# Altium PCB wien.PcbDoc
Units mm, origin at the board's own origin, x right, y up, seen from the top; angles counter-clockwise.
Board outline 100 x 50 mm, 2 copper layers (Top Layer, Bottom Layer); 19 components, 15 nets, 48 pads, 0 vias.
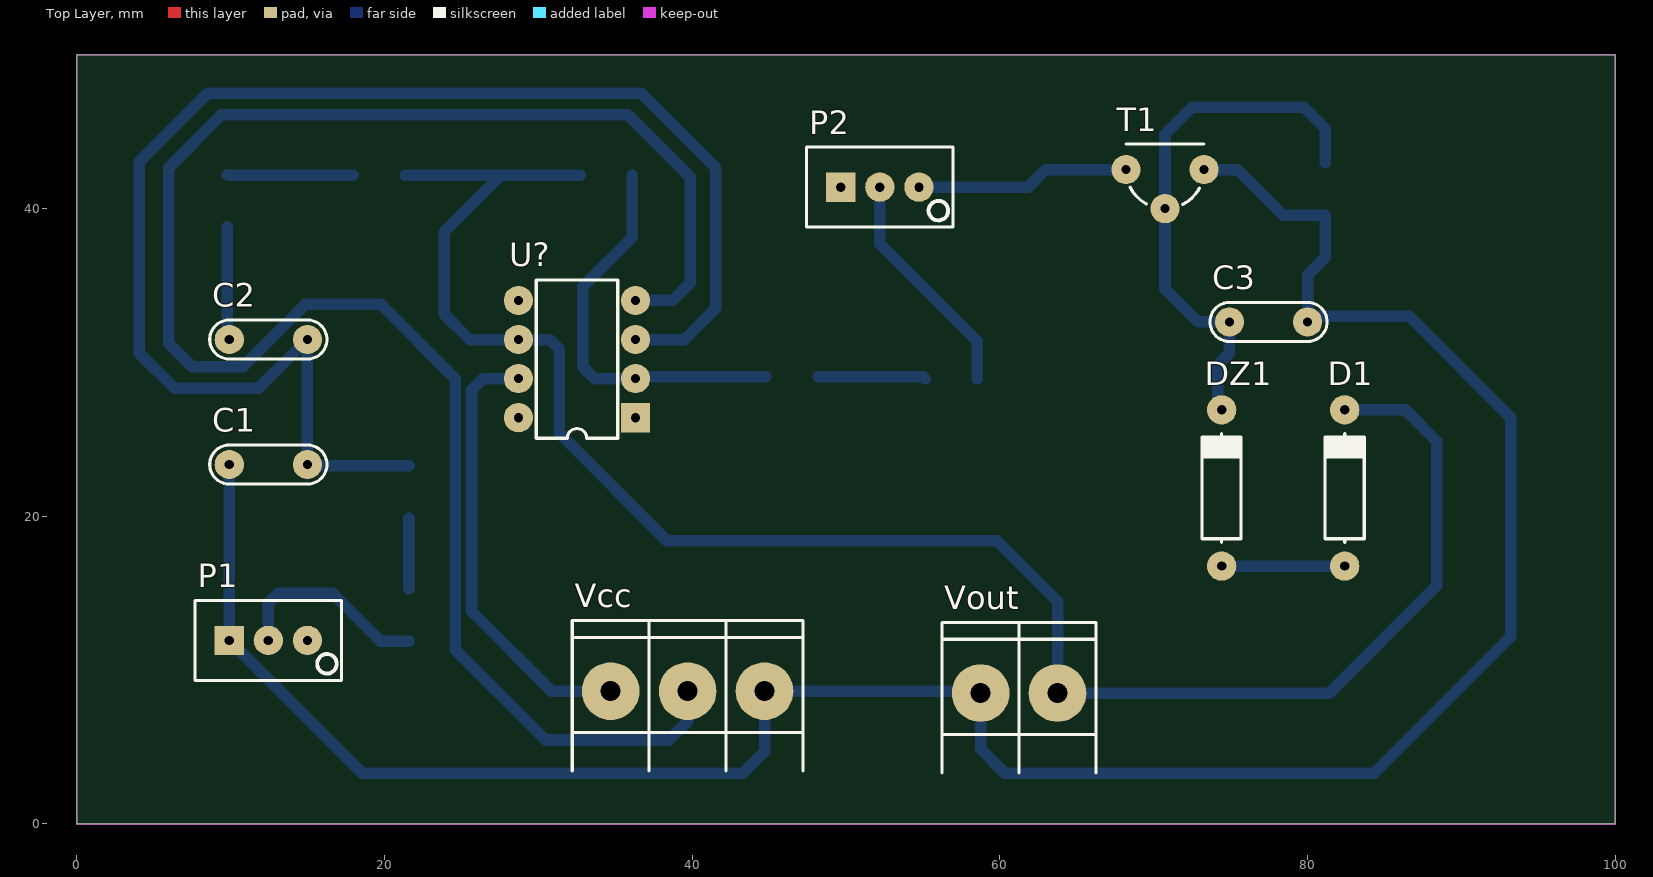
[diagram p0: Top Layer view]
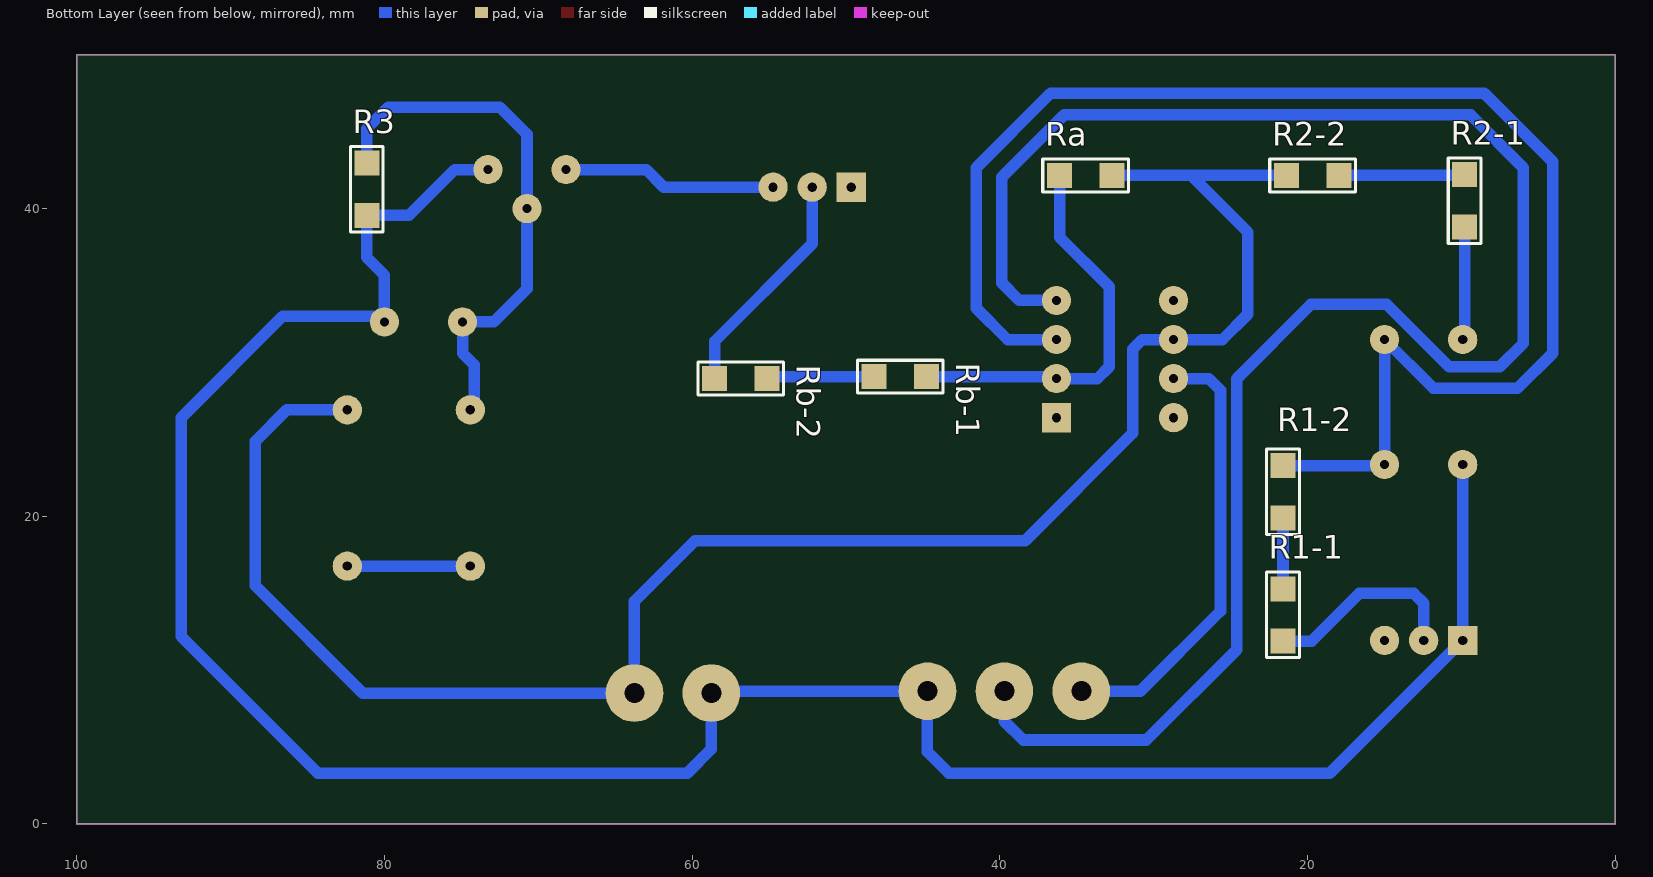
[diagram p1: Bottom Layer view, seen from below]
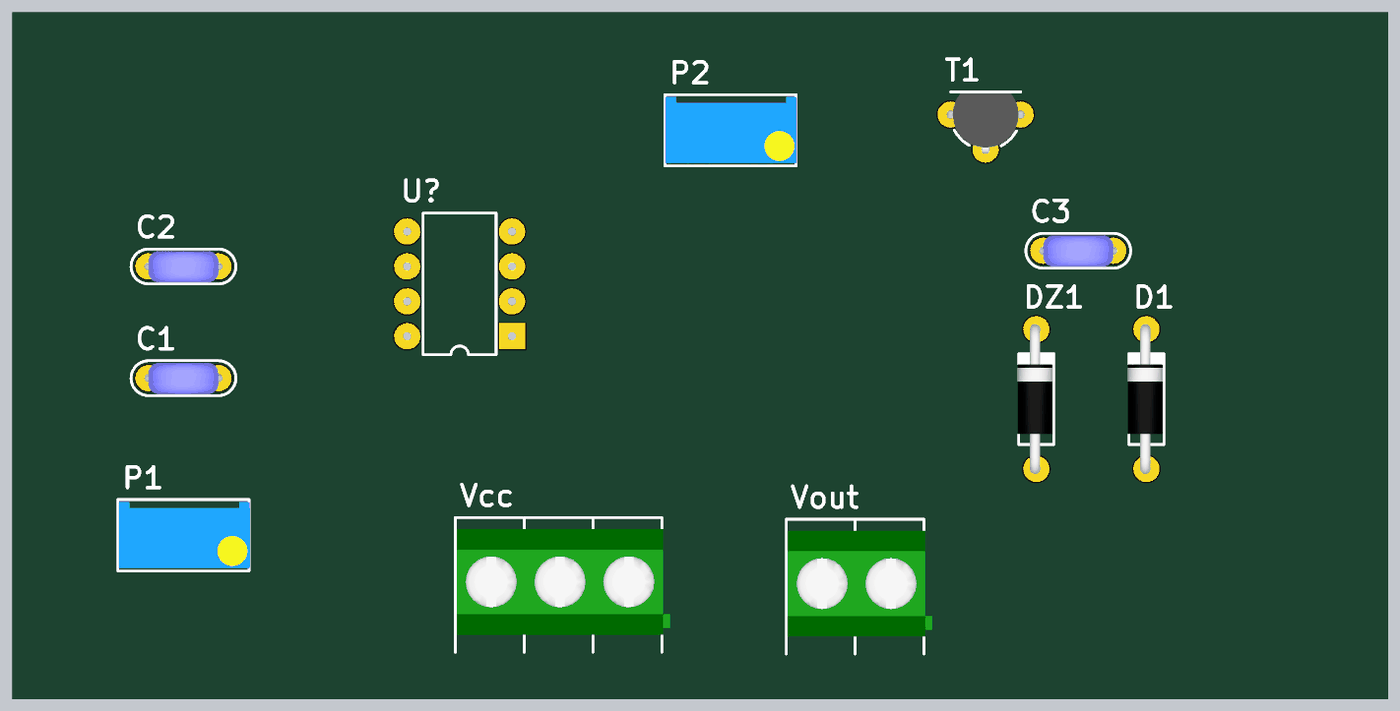
[diagram p2: 3D render of the assembled board from above, using the file's embedded part models]
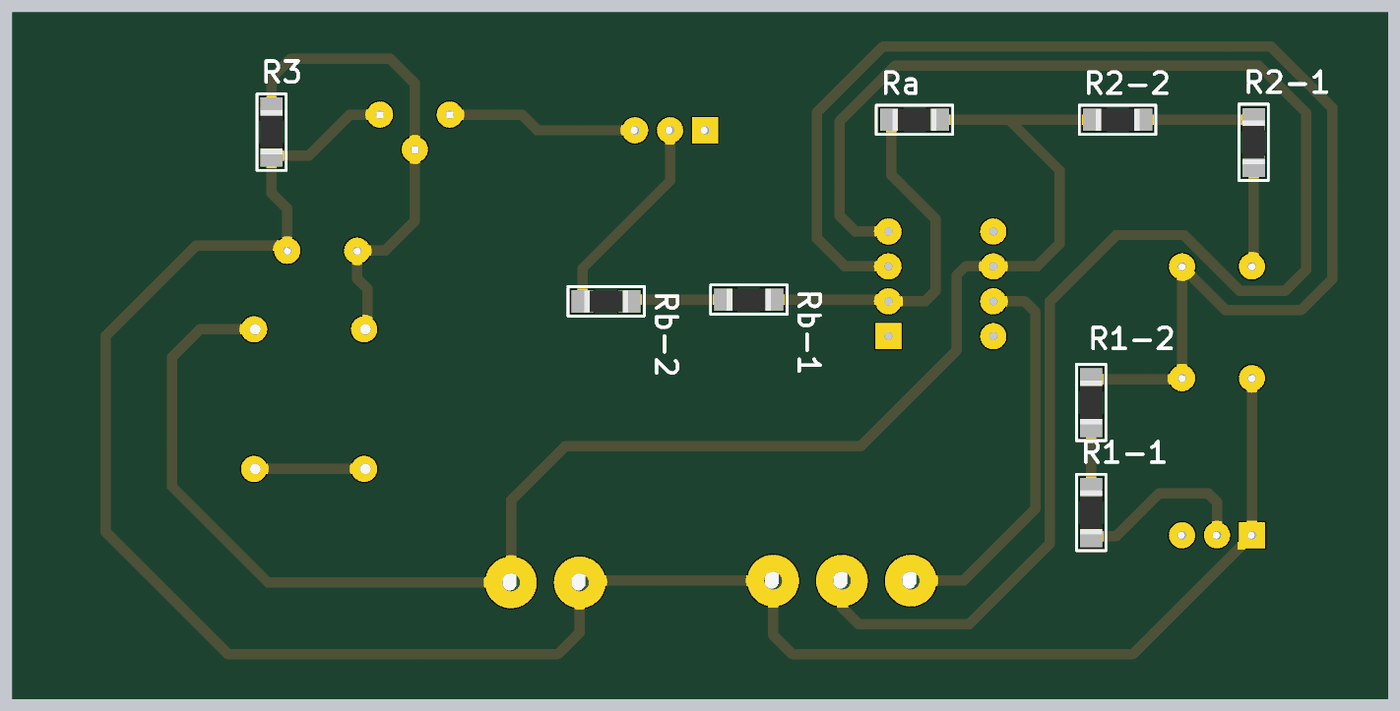
[diagram p3: 3D render of the assembled board from below, using the file's embedded part models]

## Layer stack, top to bottom
Top Solder: solder mask 0.0102, Solder Resist, Dk 3.5
Top Layer: signal copper 0.0356
Dielectric 1: dielectric 0.32, FR-4, Dk 4.8
Bottom Layer: signal copper 0.0356
Bottom Solder: solder mask 0.0102, Solder Resist, Dk 3.5

## Board outline
0,0 100,0 100,50 0,50

## Design rules (kind name [scope] priority, off if disabled: settings)
Clearance [All] p1: gap=0.3 ignorepadtopadclearanceinfootprint=FALSE
PolygonConnect [All] p1: connectstyle=Relief reliefconductorwidth=0.254 reliefentries=4 polygonreliefangle="90 Angle" airgapwidth=0.254
RoutingVias [All] p1: holewidth=0.711 width=1.27 viastyle="Through Hole" minholewidth=0.711 minwidth=1.27 maxholewidth=0.711 maxwidth=1.27
SolderMaskExpansion [All] p1: expansion=0.102
Width [All] p1: maxlimit=0.9 minlimit=0.6 preferedwidth=0.75
30 further rules are at their usual default settings.

## Components (designator, comment, footprint, x,y, rotation, side; value= is the part's Value field where it differs from the comment)
C1 "CAP" CAP200 12.446,23.368 r0 top
C2 "CAP" CAP200 12.446,31.496 r0 top
C3 "CAP" CAP200 77.47,32.639 r0 top
D1 "DIODO" DO41 82.423,21.844 r90 top
DZ1 "DIODO ZENER" DO41 74.422,21.844 r90 top
P1 "PRESET" "PRESET V" 12.446,11.938 r0 top
P2 "PRESET" "PRESET V" 52.197,41.402 r0 top
R1-1 "RES" 1206 21.59,13.589 r90 bottom
R1-2 "RES" 1206 21.59,21.59 r90 bottom
R2-1 "RES" 1206 9.779,40.513 r90 bottom
R2-2 "RES" 1206 19.66,42.164 r0 bottom
R3 "RES" 1206 81.153,41.275 r270 bottom
Ra "RES" 1206 34.417,42.164 r0 bottom
Rb-1 "RES" 1206 46.482,29.083 r180 bottom
Rb-2 "RES" 1206 56.845,28.956 r180 bottom
T1 "TRANSISTOR PNP" TO92 70.739,41.275 r0 top
U? "TL081JG" JG008 32.512,30.226 r90 top
Vcc "BORNERA 3" BORNERA3 39.704,8.636 r270 top
Vout "BORNERA 2" BORNERA2 61.254,8.509 r270 top

## Footprints (in the part's own frame and the unit in brackets; to place one, negate y for a bottom-side part, rotate by r counter-clockwise, add the part's x,y. Pads: shape width x height; smd on the part's side, far side on the other; paste and mask are expansions set on the pad)
1206 [mil] "Pasivo 1206"
  rect 64x64 smd: 1(-67,0) 2(67,0)
  silkscreen extent -109,-42 110,42, body extent -62,-31 63,31, height 20
BORNERA2 [mm] "Bornera con Tornillos 5mm separación"
  round 3.75 hole 1.3: 1(0,2.5) 2(0,-2.5)
  silkscreen extent -4.6,-5 5.2,5, body extent -3.76,-4.89 3.94,5.61, height 10
BORNERA3 [mm] "Bornera con Tornillos 5mm separación"
  round 3.75 hole 1.3: 1(0,5) 2(0,0) 3(0,-5)
  silkscreen extent -4.6,-7.5 5.2,7.5, body extent -3.76,-7.39 3.94,8.11, height 10.05
CAP200 [mm]
  round 1.9 hole 0.6: 1(-2.54,0) 2(2.54,0)
  silkscreen extent -3.81,-1.27 3.81,1.27, body extent -2.79,-1.17 2.79,1.12, height 6.24
DO41 [mm]
  round 1.9 hole 0.6: 1(-5.08,0) 2(5.08,0)
  silkscreen extent -3.56,-1.27 3.56,1.27, body extent -5.46,-1.19 5.46,1.37, height 2.03
JG008 [mm] "DIP; 8 Leads; Row Spacing 7.62 mm; Pitch 2.54 mm"
  rect 1.9x1.9 hole 0.6: 1(-3.81,-3.81)
  round 1.9 hole 0.6: 2(-1.27,-3.81) 3(1.27,-3.81) 4(3.81,-3.81) 5(3.81,3.81) 6(1.27,3.81) 7(-1.27,3.81) 8(-3.81,3.81)
  silkscreen extent -5.15,-2.65 5.15,2.65
"PRESET V" [mm]
  rect 1.9x1.9 hole 0.6: 1(-2.54,0)
  round 1.9 hole 0.6: 2(0,0) 3(2.54,0)
  silkscreen extent -4.76,-2.6 4.76,2.6, body extent -4.7,-2.42 4.83,2.42, height 11.55
TO92 [mm]
  round 1.9 hole 0.6: 1(0,-1.27) 2(2.54,1.27) 3(-2.54,1.27)
  silkscreen extent -2.54,-1 2.54,2.92, body extent -2.79,-1.55 2.79,2.79, height 8

## Part data
U?: "JFET-Input Operational Amplifier", ComponentLink1Description="Manufacturer Link", ComponentLink1URL=http://www.ti.com/, ComponentLink2Description=Datasheet, ComponentLink2URL=http://www-s.ti.com/sc/ds/tl081.pdf, DatasheetVersion=Feb-1999, LatestRevisionDate=04-Mar-2005, LatestRevisionNote="Stylized 3D Model Added.", Note="Pin 8 is not connected", PackageDescription="DIP; 8 Leads; Row Spacing 7.62 mm; Pitch 2.54 mm", PackageReference=JG008, PackageVersion=Jan-1995, Published=16-Jan-2001, Publisher="Altium Limited"

## Nets (pads, with @x,y where several pads share a name; then routed paths per layer and width w, separated by ;. In a path a pad name is that pad's centre, name@x,y a point inside that pad or via, vN(x,y) a via of type N, cw(c..) or ccw(c..) an arc to the next point about the centre after c; other vN are vias at no path point)
GND: C1.1 C3.2 P1.1 R3.2 T1.2 Vcc.1 Vout.2 | length 157.7
  Bottom Layer w0.75: C1.1 P1.1 18.542,3.302 43.307,3.302 44.704,4.699 Vcc.1 58.627,8.636 Vout.2 58.754,4.873 60.325,3.302 84.328,3.302 93.218,12.192 93.218,26.416 86.614,33.02 80.391,33.02 C3.2 80.01,35.687 81.153,36.83 R3.2 78.41,39.573 75.438,42.545 T1.2
NetC1_2: C1.2 C2.2 R1-2.2 U?.3 | length 96.9
  Bottom Layer w0.75: R1-2.2 15.062,23.292 C1.2 C2.2 11.811,28.321 6.35,28.321 4.064,30.607 4.064,43.053 8.509,47.498 36.703,47.498 41.529,42.672 41.529,33.528 39.497,31.496 U?.3
NetC2_1: C2.1 R2-1.1 | length 7.4
  Bottom Layer w0.75: R2-1.1 9.779,31.623 C2.1
NetC3_1: C3.1 DZ1.2 R3.1 T1.1 | length 35.2
  Bottom Layer w0.75: DZ1.2 74.168,27.178 74.168,29.845 74.93,30.607 C3.1 72.898,32.639 70.739,34.798 T1.1 70.739,44.831 72.517,46.609 79.756,46.609 81.153,45.212 R3.1
NetD1_1: D1.1 DZ1.1 | length 8
  Bottom Layer w0.75: DZ1.1 D1.1
NetD1_2: D1.2 R2-2.2 Ra.1 U?.6 Vout.1 | length 122.4
  Bottom Layer w0.75: R2-2.2 27.559,42.164 ; Ra.1 27.559,42.164 ; D1.2 86.36,26.924 88.392,24.892 88.392,15.494 81.407,8.509 Vout.1 63.754,14.478 59.817,18.415 38.354,18.415 31.369,25.4 31.369,30.861 30.734,31.496 U?.6 25.527,31.496 23.876,33.147 23.876,38.481 27.559,42.164
NetP1_2: P1.2 R1-1.1 | length 13.1
  Bottom Layer w0.75: P1.2 12.446,14.351 13.081,14.986 16.637,14.986 19.736,11.887 R1-1.1
NetP2_2: P2.2 Rb-2.1 | length 15.1
  Bottom Layer w0.75: P2.2 52.197,37.719 58.547,31.369 Rb-2.1
NetP2_3: P2.3 T1.3 | length 13.9
  Bottom Layer w0.75: P2.3 61.849,41.402 62.992,42.545 T1.3
NetR1-1_2: R1-1.2 R1-2.1 | length 4.6
  Bottom Layer w0.75: R1-1.2 R1-2.1
NetR2-1_2: R2-1.2 R2-2.1 | length 8.2
  Bottom Layer w0.75: R2-1.2 9.83,42.164 R2-2.1
NetRa_2: Ra.2 Rb-1.2 U?.2 | length 26
  Bottom Layer w0.75: Ra.2 36.119,38.151 32.893,34.925 32.893,29.718 33.655,28.956 U?.2 36.449,29.083 Rb-1.2
NetRb-1_1: Rb-1.1 Rb-2.2 | length 7
  Bottom Layer w0.75: Rb-1.1 55.016,29.083 Rb-2.2
VCC+: U?.7 Vcc.3 | length 28.9
  Bottom Layer w0.75: U?.7 26.416,28.956 25.654,28.194 25.654,17.431 25.654,13.843 30.861,8.636 Vcc.3
VCC-: U?.4 Vcc.2 | length 119.9
  Bottom Layer w0.75: U?.4 38.735,34.036 39.878,35.179 39.878,42.037 35.814,46.101 9.398,46.101 5.969,42.672 5.969,31.242 7.493,29.718 10.795,29.718 14.859,33.782 19.773,33.782 24.604,28.951 24.604,24.547 24.604,11.337 30.48,5.461 38.481,5.461 39.704,6.684 Vcc.2
pads on no net: P1.3 P2.1 U?.1 U?.5 U?.8

## Keep-outs
Keep-Out Layer:
  the board outline again, w0.1